# EAGLE board BRD (EAGLE 8.2.2)
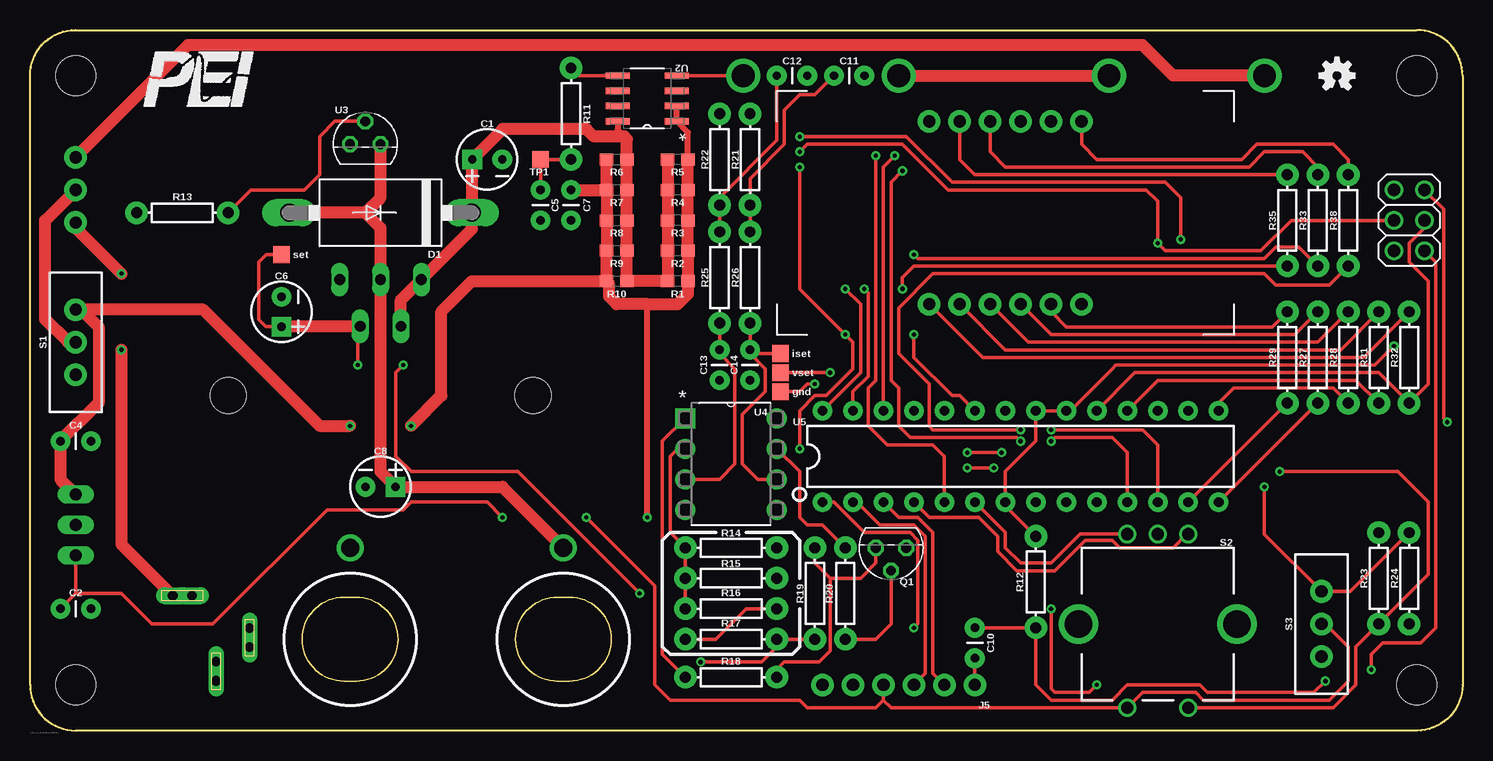
[diagram p0: board, top side]
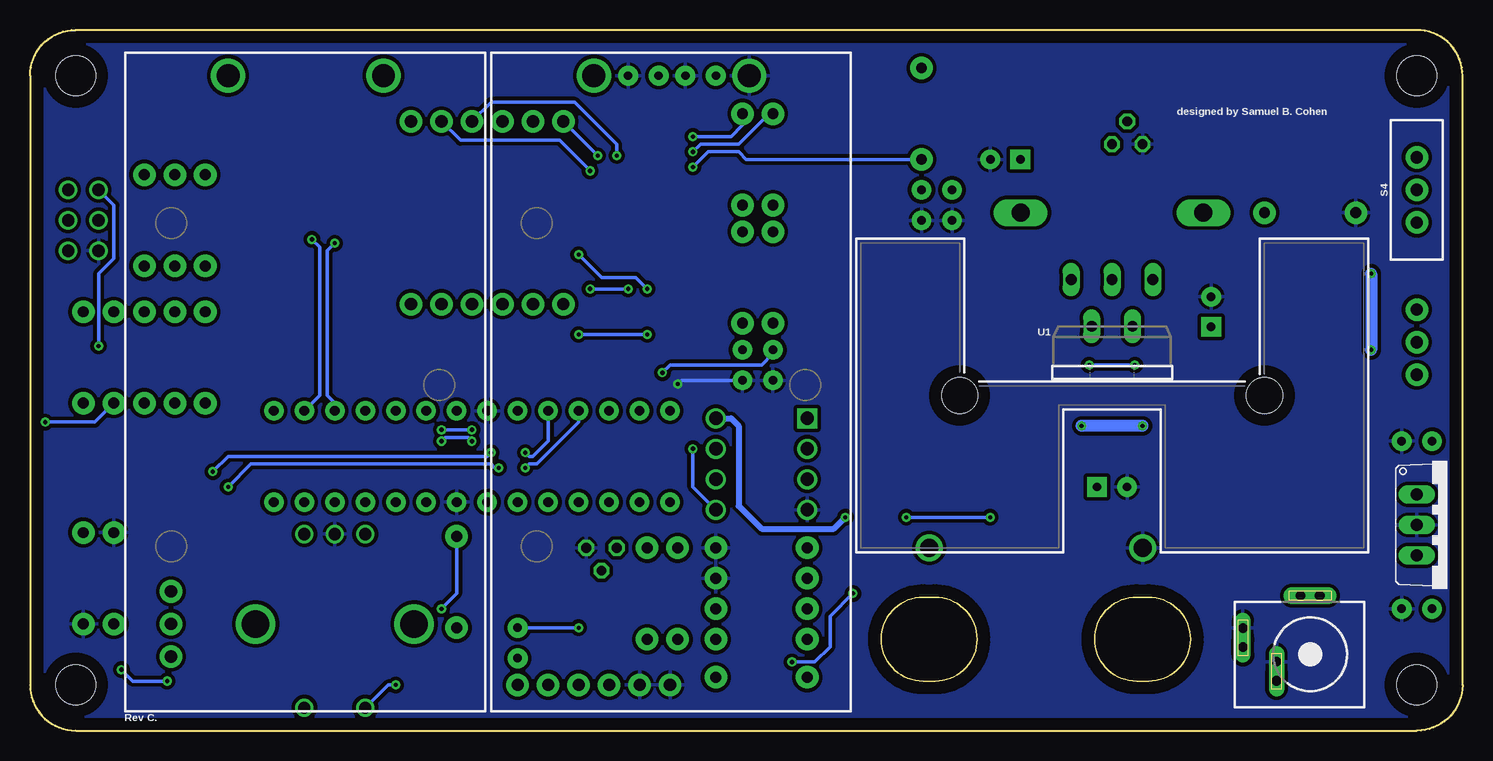
[diagram p1: board, bottom side, seen from below]

Size 119.38 x 58.42 mm. Coordinates in mm from the lower left corner, seen from the top.
Outline: 0,3.81 0,54.61 arc-90 3.81,58.42 115.57,58.42 arc-90 119.38,54.61 119.38,3.81 arc-90 115.57,0 3.81,0 arc-90 0,3.81
Copper layers (1*16): Top 0.035mm / dielectric 1.5mm / Bottom 0.035mm
Design rules "default": minimum track width 6mil, minimum drill 0.35mm, track to track 6mil, track to pad 6mil, pad to pad 6mil, via to via 6mil, smd to smd 6mil, copper to edge 40mil, drill to drill 6mil, minimum pad ring 10mil, minimum via ring 8mil, stop-mask expansion 4mil, vias tented up to drill 0mil, thermal gap 10mil

## Footprints (pad centres in the part's own frame; a part is rotated, then mirrored left to right if it is on the bottom)
BATTCON_9V = drill 1.905: + 0,0; - 0,-12.954
CPOL-RADIAL-2.5MM-5MM = drill 0.7 pad 1.651 square: 1 1.25,0 | drill 0.7 pad 1.651: 2 -1.25,0
CAP-PTH-2.54 = drill 0.7 pad 1.651: 1 -1.27,0; 2 1.27,0
DO201-15 = drill 1.499 long: A 7.62,0; C -7.62,0
STAND-OFF = hole 3.302: 0,0
6400BG_HEATSINK = hole 2.997: -12.7,0; 12.7,0
TO220V = drill 1.016 long: 1 -2.54,-2.54; 2 0,-2.54; 3 2.54,-2.54
PINHD2X03 = drill 1.016: 1 -2.54,1.27; 2 -2.54,-1.27; 3 0,1.27; 4 0,-1.27; 5 2.54,1.27; 6 2.54,-1.27
BINDING_POST = drill 1.5: P$1 0,7.62
1X06_NO_SILK = drill 1.016 pad 1.88: 1 0,0; 2 2.54,0; 3 5.08,0; 4 7.62,0; 5 10.16,0; 6 12.7,0
TO92 = drill 0.813 octagon: 1 1.27,0; 2 0,1.905; 3 -1.27,0
0603 = smd 1.1 x 1: 1 -0.85,0; 2 0.85,0
AXIAL-0.3 = drill 0.9 pad 1.88: P$1 -3.81,0; P$2 3.81,0
SWITCH_SPDT_PTH_11.6X4.0MM_LOCK = drill 1.016 pad 1.88: 1 0,2.718; 2 0,0; 3 0,-2.718
ROTARY_ENC_PLAIN = drill 1.016: A 7.493,-2.54; B 7.493,2.54; C 7.493,0; SW+ -6.985,2.54; SW- -6.985,-2.54 | drill 2.286: P$3 0,6.604; P$4 0,-6.604
TP14SQ = smd 1.4 x 1.4: TP 0,0
TO220-51 = drill 0.9 long: 1 -3.4,-8.4; 2 -1.7,-4.5; 3 0,-8.4; 4 1.7,-4.5; 5 3.4,-8.4
SOIC127P600X175-8N = smd 1.981 x 0.533: 1 -2.464,1.905; 2 -2.464,0.635; 3 -2.464,-0.635; 4 -2.464,-1.905; 5 2.464,-1.905; 6 2.464,-0.635; 7 2.464,0.635; 8 2.464,1.905
DIP254P762X508-8 = drill 1.118 square: 1 -7.62,7.62 | drill 1.118: 2 -7.62,5.08; 3 -7.62,2.54; 4 -7.62,0; 5 0,0; 6 0,2.54; 7 0,5.08; 8 0,7.62
DIP28 = drill 0.813 pad 1.626: 1 -16.51,-3.81; 2 -13.97,-3.81; 3 -11.43,-3.81; 4 -8.89,-3.81; 5 -6.35,-3.81; 6 -3.81,-3.81; 7 -1.27,-3.81; 8 1.27,-3.81; 9 3.81,-3.81; 10 6.35,-3.81; 11 8.89,-3.81; 12 11.43,-3.81; 13 13.97,-3.81; 14 16.51,-3.81; 15 16.51,3.81; 16 13.97,3.81; 17 11.43,3.81; 18 8.89,3.81; 19 6.35,3.81; 20 3.81,3.81; 21 1.27,3.81; 22 -1.27,3.81; 23 -3.81,3.81; 24 -6.35,3.81; 25 -8.89,3.81; 26 -11.43,3.81; 27 -13.97,3.81; 28 -16.51,3.81
KLDVX-0202-A = drill 0.8 pad 1.4 long: 1 -4.9,0.8; 1@1 -4.9,-0.8 | drill 0.8 pad 1.3 long: 2 -2.2,-5.6; 2@1 -0.6,-5.6; 3 0.6,-2.8; 3@1 2.2,-2.8

## Placement (x,y rotation side)
BT1  [BATTCON_9V]  102.87,54.61 90 bottom
BT2  [BATTCON_9V]  72.39,54.61 90 bottom
C1  10uF  [CPOL-RADIAL-2.5MM-5MM]  38.1,47.62 180 top
C2  0.1uF  [CAP-PTH-2.54]  3.81,10.16 0 top
C4  0.1uF  [CAP-PTH-2.54]  3.81,24.13 0 top
C5  1uF  [CAP-PTH-2.54]  42.55,43.81 90 top
C6  10uF  [CPOL-RADIAL-2.5MM-5MM]  20.95,34.92 270 top
C7  0.1uF  [CAP-PTH-2.54]  45.09,43.81 270 top
C8  10uF  [CPOL-RADIAL-2.5MM-5MM]  29.21,20.32 0 top
C10  0.1uF  [CAP-PTH-2.54]  78.74,7.3 270 top
C11  0.1uF  [CAP-PTH-2.54]  68.26,54.61 180 top
C12  0.1uF  [CAP-PTH-2.54]  63.5,54.61 180 top
C13  0.1uF  [CAP-PTH-2.54]  57.47,30.48 90 top
C14  0.1uF  [CAP-PTH-2.54]  60.01,30.48 90 top
D1  1N5400  [DO201-15]  29.21,43.18 180 top
H1  STAND-OFF  [STAND-OFF]  115.57,54.61 0 top
H2  STAND-OFF  [STAND-OFF]  3.81,3.81 0 top
H3  STAND-OFF  [STAND-OFF]  115.57,3.81 0 top
H4  STAND-OFF  [STAND-OFF]  3.81,54.61 0 top
H5  6400BG_HEATSINK  [6400BG_HEATSINK]  29.21,27.94 180 bottom
IC1  7805TV  [TO220V]  1.27,17.14 270 bottom
J1  [PINHD2X03]  114.94,42.55 270 top
J2  BINDING_POST  [BINDING_POST]  44.45,7.62 0 top
J3  BINDING_POST  [BINDING_POST]  26.67,7.62 0 top
J4  [1X06_NO_SILK]  74.93,35.56 0 top
J5  [1X06_NO_SILK]  78.74,3.81 180 top
J6  [1X06_NO_SILK]  87.63,50.8 180 top
Q1  2N3904BU  [TO92]  71.75,15.24 180 top
R1  2R  [0603]  53.98,37.47 180 top
R2  2R  [0603]  53.98,40.01 180 top
R3  2R  [0603]  53.98,42.55 180 top
R4  2R  [0603]  53.98,45.09 180 top
R5  2R  [0603]  53.98,47.62 180 top
R6  2R  [0603]  48.9,47.62 0 top
R7  2R  [0603]  48.9,45.09 0 top
R8  2R  [0603]  48.9,42.55 0 top
R9  2R  [0603]  48.9,40.01 0 top
R10  2R  [0603]  48.9,37.47 0 top
R11  330R  [AXIAL-0.3]  45.09,51.44 270 top
R12  10K  [AXIAL-0.3]  83.82,12.38 90 top
R13  100R  [AXIAL-0.3]  12.7,43.18 0 top
R14  10K  [AXIAL-0.3]  58.42,15.24 180 top
R15  10K  [AXIAL-0.3]  58.42,12.7 180 top
R16  10K  [AXIAL-0.3]  58.42,10.16 0 top
R17  10K  [AXIAL-0.3]  58.42,7.62 0 top
R18  1K  [AXIAL-0.3]  58.42,4.45 0 top
R19  100R  [AXIAL-0.3]  65.41,11.43 270 top
R20  10K  [AXIAL-0.3]  67.94,11.43 90 top
R21  10K  [AXIAL-0.3]  60.01,47.62 270 top
R22  10K  [AXIAL-0.3]  57.47,47.62 270 top
R23  10K  [AXIAL-0.3]  112.39,12.7 270 top
R24  10K  [AXIAL-0.3]  114.94,12.7 90 top
R25  10K  [AXIAL-0.3]  57.47,37.78 270 top
R26  10K  [AXIAL-0.3]  60.01,37.78 270 top
R27  10K  [AXIAL-0.3]  107.31,31.11 270 top
R28  10K  [AXIAL-0.3]  109.86,31.11 270 top
R29  10K  [AXIAL-0.3]  104.78,31.11 270 top
R31  10K  [AXIAL-0.3]  112.39,31.11 270 top
R32  10K  [AXIAL-0.3]  114.94,31.11 270 top
R33  10K  [AXIAL-0.3]  107.31,42.55 270 top
R35  10K  [AXIAL-0.3]  104.78,42.55 270 top
R38  10K  [AXIAL-0.3]  109.86,42.55 270 top
S1  [SWITCH_SPDT_PTH_11.6X4.0MM_LOCK]  3.81,32.38 0 top
S2  ENCODER-SWITCH  [ROTARY_ENC_PLAIN]  93.98,8.89 90 top
S3  [SWITCH_SPDT_PTH_11.6X4.0MM_LOCK]  107.63,8.89 0 top
S4  [SWITCH_SPDT_PTH_11.6X4.0MM_LOCK]  3.81,45.09 0 bottom
TP1  TPTP14SQ  [TP14SQ]  42.55,47.62 180 top
TP2  TPTP14SQ  [TP14SQ]  62.55,31.43 0 top
TP3  TPTP14SQ  [TP14SQ]  62.55,29.84 0 top
TP4  TPTP14SQ  [TP14SQ]  20.95,39.69 0 top
TP5  TPTP14SQ  [TP14SQ]  62.55,28.26 0 top
U1  LT3080ETPBF  [TO220-51]  29.21,29.21 180 bottom
U2  MAX4080FASA+  [SOIC127P600X175-8N]  51.44,52.7 180 top
U3  LM334Z-NOPB  [TO92]  27.94,48.9 0 top
U4  TLC2272CP  [DIP254P762X508-8]  62.23,18.41 0 top
U5  328P  [DIP28]  82.55,22.86 0 top
U$1  KLDVX-0202-A  [KLDVX-0202-A]  12.7,6.35 270 bottom
U$2  [OSHW-LOGO-S]  108.92,54.61 0 top

## Library data of the parts
BT1 BT2 = SparkFun-Batteries; PROD_ID: BATT-10855
C1 C6 C8 = SparkFun-Capacitors; PROD_ID: CAP-08440
C2 C4 C5 C7 C10-C14 = SparkFun-Capacitors; PROD_ID: CAP-09128
D1 = Bifrost_parts; DESCRIPTION: Diode, 50V, 3A, Rectifier; MPN: 1N5400G; OC_FARNELL: 1458988; OC_NEWARK: 42K2929; PACKAGE: DO-201AD; SUPPLIER: ON Semiconductors
H1-H4 = SparkFun-Hardware
H5 = SparkFun-Hardware; PROD_ID: COMP-09537; SF_SKU: PRT-09576
IC1 = linear
J1 = Bifrost_parts
J2 J3 = SparkFun-Connectors; PROD_ID: CONN-09675; SF_ID: PRT-09740
J4-J6 = SparkFun-Connectors; PROD_ID: CONN-08437
Q1 = Bifrost_parts; DESCRIPTION: Transistor, NPN; MPN: 2N3904BU; OC_FARNELL: 1700648; OC_NEWARK: 83C3116; PACKAGE: TO-92; SUPPLIER: Fairchild Semiconductors
R1-R10 = SparkFun-Resistors; PROD_ID: RES-08609
R11-R29 R31-R33 R35 R38 = SparkFun-Resistors; PROD_ID: RES-12182
S1 S3 S4 = SparkFun-Switches; PROD_ID: SWCH-08261; SF_SKU: COM-00102
S2 = SparkFun-Switches; SF_SKU: COM-09117
TP1-TP5 = testpad
U1 = Bifrost_parts; DESCRIPTION: Adjustable1.1A Single Resistor Low Dropout Regulator; MPN: LT3080ET#PBF; OC_FARNELL: 1537445; OC_NEWARK: 64M0567; PACKAGE: TO220-51; SUPPLIER: Linear Technologies
U2 = Bifrost_parts; DESCRIPTION: 76V, High-Side, Current-Sense Amplifiers with Voltage Output; MPN: MAX4080FASA+; OC_FARNELL: -; OC_NEWARK: 43K3468; PACKAGE: SOIC-8; SUPPLIER: Maxim
U3 = Bifrost_parts; DESCRIPTION: 3-Terminal Adjustable Current Source; MPN: LM334Z-NOPB; OC_FARNELL: 1564650; OC_NEWARK: 41K4701; PACKAGE: TO-92; SUPPLIER: Texas Instruments
U4 = Texas Instruments_By_element14_Batch_1; MPN: TLC2272CP; OC_FARNELL: 8454051; OC_NEWARK: 35K1183; PACKAGE: PDIP; SUPPLIER: Texas Instruments
U5 = SparkFun-IC-Microcontroller; PROD_ID: IC-09136
U$1 = con-kycon; OC_FARNELL: unknown; OC_NEWARK: unknown
U$2 = SparkFun-Aesthetics

## Nets
5V: C2.1 IC1.3 J1.2 J5.4 R12.P$2 S2.SW+ S3.2 U5.7 U5.20 U5.21
A: R35.P$2 U5.27
B: R38.P$2 U5.12
BTN: R23.P$2 S2.SW- U5.24
C: R27.P$2 U5.14
D: J1.1 R31.P$2 U5.18
D1: J6.6 U5.26
D2: J6.3 U5.5
D3: J6.2 U5.11
DP: R28.P$2 U5.15
E: J1.3 R32.P$2 U5.19
F: R33.P$2 U5.28
G: R29.P$2 U5.13
GND: BT2.- C1.2 C2.2 C4.2 C5.1 C6.2 C7.2 C8.2 C11.1 C12.1 C13.1 C14.1 IC1.2 J1.6 J3.P$1 J5.5 J5.6 Q1.3 R13.P$1 R14.P$1 R15.P$1 R23.P$1 R24.P$1 S2.C TP5.TP U2.4 U3.3 U4.4 U5.8 U5.22 U$1.2 U$1.3
ISENSE: C5.2 R11.P$2 TP1.TP U4.5 U5.23
ISET: C14.2 R26.P$2 TP2.TP U4.6
ISETMCU: R21.P$1 U5.16
LIMIT: R20.P$2 U4.7
LOAD: R24.P$2 S3.1 U5.25
N$1: S4.3 U$1.1
N$2: C10.2 J5.1
N$4: C1.1 D1.C R1.2 R2.2 R3.2 R4.2 R5.2 R6.2 R7.2 R8.2 R9.2 R10.2 U1.4 U1.5 U2.8
N$5: R11.P$1 U2.5
N$6: R18.P$1 U4.1
N$7: R13.P$2 U3.2
N$8: Q1.1 R18.P$2 R19.P$1
N$9: Q1.2 R20.P$1
N$10: R16.P$2 R17.P$1
N$11: R14.P$2 R15.P$2 R16.P$1 U4.2
N$13: BT1.- BT2.+
N$14: S1.2 S4.2
N$15: BT1.+ S4.1
N$17: J4.5 R29.P$1
N$18: J4.4 R27.P$1
N$19: J4.3 R28.P$1
N$20: C11.2 R21.P$2 R26.P$1
N$21: C12.2 R22.P$2 R25.P$1
N$22: J4.2 R31.P$1
N$23: J4.1 R32.P$1
N$31: J6.5 R35.P$1
N$32: J6.4 R33.P$1
N$35: J6.1 R38.P$1
OUT: C8.1 D1.A J2.P$1 U1.3 U3.1
QUADA: S2.A U5.4
QUADB: S2.B U5.6
RESET: C10.1 J1.5 R12.P$1 U5.1
RX: J5.3 U5.2
SET: C6.1 R17.P$2 R19.P$2 TP4.TP U1.2
TX: J5.2 U5.3
VCC: C4.1 C7.1 IC1.1 R1.1 R2.1 R3.1 R4.1 R5.1 R6.1 R7.1 R8.1 R9.1 R10.1 S1.1 U2.1 U2.2 U4.8
VSET: C13.2 R25.P$2 TP3.TP U4.3
VSETMCU: J1.4 R22.P$1 U5.17

## Tracks (layer width: path | path; a pad name or v marks a point on that pad's centre or on a via)
5V  (via drill 0.35)
  Top 0.305: IC1.3 3.81,11.43 | 3.81,11.43 C2.1 | 3.81,11.43 7.62,11.43 10.16,8.89 15.24,8.89 24.77,18.41 31.11,18.41 31.75,19.05 38.1,19.05 v39.37,17.78 | S3.2 107.95,8.57 108.27,8.57 109.86,6.99 109.86,4.13 108.27,2.54 97.79,2.54 97.16,3.17 92.71,3.17 S2.SW+ 71.75,1.91 71.12,2.54 | v46.35,17.78 52.07,12.06 52.07,3.81 53.34,2.54 64.14,2.54 64.77,1.91 70.48,1.91 71.12,2.54 | 71.12,2.54 J5.4 | R12.P$2 81.28,18.73 U5.7 81.28,21.59 83.82,24.13 U5.21 U5.20 86.68,26.67 90.17,30.16 90.49,30.48 112.08,30.48 v113.67,32.07 | v85.09,10.16 85.09,3.49 85.41,3.17 88.27,3.17 v88.9,3.81
  Bottom 0.305: v39.37,17.78 v46.35,17.78 | R12.P$2 83.82,11.43 v85.09,10.16 | v88.9,3.81 89.53,3.81 S2.SW+ | v113.67,32.07 113.67,38.1 112.39,39.37 112.39,43.81 J1.2
A  (via drill 0.35)
  Top 0.305: U5.27 68.58,28.26 69.85,29.53 69.85,36.51 v69.53,36.83 | v72.71,36.83 72.71,37.78 73.66,38.73 R35.P$2
  Bottom 0.305: v69.53,36.83 v72.71,36.83
B  (via drill 0.35)
  Top 0.305: U5.12 93.98,23.81 92.71,25.08 v85.09,25.08 | v82.55,25.08 75.25,25.08 74.93,25.4 74.93,28.89 72.39,31.43 72.39,35.24 75.25,38.1 102.87,38.1 103.82,37.15 108.27,37.15 R38.P$2
  Bottom 0.305: v85.09,25.08 v82.55,25.08
BTN  (via drill 0.35)
  Top 0.305: S2.SW- 108.58,1.91 110.49,3.81 110.49,6.99 R23.P$2 116.52,13.02 116.52,19.05 113.98,21.59 v104.14,21.59 | v78.11,23.18 v80.96,23.18
  Bottom 0.305: U5.24 76.2,24.13 77.47,22.86 77.79,22.86 v78.11,23.18 | v104.14,21.59 102.87,22.86 81.28,22.86 v80.96,23.18
C
  Top 0.305: U5.14 R27.P$2
D  (via drill 0.35)
  Top 0.305: J1.1 117.79,43.5 117.79,26.04 v118.11,25.72 | R31.P$2 110.49,29.21 93.98,29.21 U5.18
  Bottom 0.305: v118.11,25.72 113.98,25.72 R31.P$2
D1  (via drill 0.35)
  Top 0.305: U5.26 71.12,46.99 v72.07,47.94
  Bottom 0.305: v72.07,47.94 J6.6
D2  (via drill 0.35)
  Top 0.305: U5.5 76.2,22.86 75.25,23.81 71.44,23.81 69.85,25.4 69.85,28.57 70.48,29.21 v70.48,47.94
  Bottom 0.305: v70.48,47.94 70.48,48.9 73.98,52.39 80.96,52.39 J6.3
D3  (via drill 0.35)
  Top 0.305: U5.11 91.44,23.18 90.17,24.45 85.41,24.45 v85.09,24.13 | v82.55,24.13 82.23,24.45 73.34,24.45 72.39,25.4 72.39,28.57 71.75,29.21 71.75,45.72 v72.71,46.67
  Bottom 0.305: v85.09,24.13 84.77,24.45 82.87,24.45 v82.55,24.13 | v72.71,46.67 75.25,49.21 83.5,49.21 J6.2
DP
  Top 0.305: U5.15 99.06,27.3 100.33,28.57 108.58,28.57 R28.P$2
E
  Top 0.305: J1.3 116.2,41.91 114.94,40.64 114.94,39.05 116.52,37.47 116.52,28.89 R32.P$2 112.39,29.84 92.08,29.84 U5.19
F  (via drill 0.35)
  Top 0.305: U5.28 69.22,29.84 69.22,35.56 v67.94,36.83 | v73.66,39.69 73.98,39.37 102.87,39.37 103.82,40.32 105.73,40.32 R33.P$2
  Bottom 0.305: v73.66,39.69 71.75,37.78 68.9,37.78 v67.94,36.83
G
  Top 0.305: U5.13 R29.P$2
GND  (via drill 0.35)
  Top 0.305: v65.41,28.89 64.77,28.89 64.14,28.26 TP5.TP | U2.4 BT2.-
  Bottom 0.305: C14.1 65.09,29.21 v65.41,28.89
  pour Bottom (isolate 0.305): 3.81,58.42 arc90 0,54.61 0,3.81 arc90 3.81,0 5.08,0 115.57,0 arc90 119.38,3.81 119.38,54.61 arc90 115.57,58.42 114.3,58.42
ISENSE  (via drill 0.35)
  Top 0.305: TP1.TP C5.2 | TP1.TP | R11.P$2 TP1.TP | v73.66,33.02 73.66,31.11 76.83,27.94 77.47,27.94 U5.23 | v64.14,23.5 64.14,26.67 65.41,27.94 66.36,27.94 68.58,30.16 68.58,32.38 v67.94,33.02 64.14,36.83 v64.14,46.99
  Bottom 0.305: U4.5 64.14,20.32 v64.14,23.5 | v67.94,33.02 v73.66,33.02 | R11.P$2 59.69,47.62 60.33,48.26 62.87,48.26 v64.14,46.99
ISET
  Top 0.305: C14.2 R26.P$2 | C14.2 60.01,31.43 61.28,30.16 61.28,28.26 59.37,26.35 59.37,22.23 60.64,20.95 U4.6 | TP2.TP 60.33,31.43 C14.2
ISETMCU  (via drill 0.35)
  Top 0.305: v64.14,49.53 73.03,49.53 76.83,45.72 94.61,45.72 95.89,44.45 v95.89,40.96
  Bottom 0.305: R21.P$1 60.01,50.48 60.96,49.53 v64.14,49.53 | U5.16 95.25,27.94 95.25,40.32 v95.89,40.96
LIMIT
  Top 0.305: R20.P$2 66.04,17.14 64.77,17.14 64.14,17.78 64.14,21.59 U4.7
LOAD  (via drill 0.35)
  Top 0.305: R24.P$2 110.03,11.61 S3.1 102.87,16.37 v102.87,20.32 | v78.11,21.91 v80.33,21.91
  Bottom 0.305: U5.25 73.66,25.72 77.15,22.23 77.79,22.23 v78.11,21.91 | v102.87,20.32 100.97,22.23 80.96,22.23 80.64,21.91 v80.33,21.91
N$1  (via drill 0.35)
  Top 1.016: S4.3 3.81,41.91 v7.62,38.1 | v7.62,31.75 7.62,15.53 U$1.1
  Bottom 1.016: v7.62,38.1 v7.62,31.75
N$2
  Top 0.305: C10.2 J5.1
N$4
  Top 0.508: U2.8 48.97,50.09 49.53,49.53
  Top 1.016: R5.2 R4.2 R3.2 R2.2 R1.2 R10.2 R9.2 R8.2 R7.2 R6.2 49.74,49.31 49.53,49.53 46.99,49.53 46.35,50.16 39.39,50.16 C1.1 36.83,47.6 D1.C 36.83,41.83 U1.5 30.91,35.91 U1.4
N$5
  Top 0.305: U2.5 45.72,54.61 R11.P$1
N$6
  Top 0.305: R18.P$1 52.7,6.35 52.7,24.13 U4.1
N$7
  Top 0.305: U3.2 25.4,50.8 24.13,49.53 24.13,46.35 22.86,45.09 18.41,45.09 R13.P$2
N$8
  Top 0.305: Q1.1 70.48,13.97 69.22,12.7 66.67,12.7 | 66.67,12.7 65.41,13.97 R19.P$1 | 66.67,12.7 66.67,6.63 65.75,5.71 62.87,5.71 62.23,5.08 R18.P$2
N$9
  Top 0.305: R20.P$1 70.48,7.62 71.75,8.89 Q1.2
N$10
  Top 0.305: R17.P$1 57.15,7.62 59.69,10.16 R16.P$2
N$11
  Top 0.305: R16.P$1 R15.P$2 R14.P$2 53.34,16.51 53.34,22.86 53.98,23.5 U4.2
N$13
  Top 1.016: BT2.+ BT1.-
N$14
  Top 1.016: S1.2 3.17,32.38 1.27,34.29 1.27,42.55 S4.2
N$15
  Top 1.016: BT1.+ 95.25,54.61 92.71,57.15 13.16,57.15 S4.1
N$17
  Top 0.305: J4.5 85.09,34.92 86.36,33.66 103.5,33.66 R29.P$1
N$18
  Top 0.305: J4.4 85.09,33.02 105.41,33.02 R27.P$1
N$19
  Top 0.305: J4.3 83.19,32.38 107.31,32.38 R28.P$1
N$20
  Top 0.305: C11.2 65.41,53.02 64.14,53.02 62.87,51.75 62.87,48.9 60.01,46.04 R21.P$2 R26.P$1
N$21
  Top 0.305: C12.2 62.23,49.21 57.47,44.45 R22.P$2 R25.P$1
N$22
  Top 0.305: J4.2 81.28,31.75 109.22,31.75 R31.P$1
N$23
  Top 0.305: J4.1 79.38,31.11 111.12,31.11 R32.P$1
N$31
  Top 0.305: J6.5 77.47,47.62 78.74,46.35 R35.P$1
N$32
  Top 0.305: J6.4 80.01,48.26 81.28,46.99 101.6,46.99 102.87,48.26 106.05,48.26 107.31,46.99 R33.P$1
N$35
  Top 0.305: J6.1 87.63,48.9 88.9,47.62 100.97,47.62 102.23,48.9 108.58,48.9 109.86,47.62 R38.P$1
OUT
  Top 1.016: 27.94,43.18 D1.A | 27.94,43.18 29.21,44.45 U3.1 | 27.94,43.18 29.21,41.91 U1.3 29.21,21.57 C8.1 39.37,20.32 J2.P$1
QUADA
  Top 0.305: S2.A 96.39,16.38 95.25,15.24 90.81,15.24 90.17,15.88 87.95,15.88 85.41,13.34 82.23,13.34 80.64,14.92 80.64,16.19 79.06,17.78 74.93,17.78 U5.4
QUADB
  Top 0.305: S2.B 87.5,16.38 85.09,13.97 82.55,13.97 81.28,15.24 81.28,16.51 U5.6
RESET  (via drill 0.35)
  Top 0.305: C10.1 R12.P$1 83.82,3.81 85.09,2.54 90.17,2.54 91.44,3.81 97.47,3.81 98.11,3.17 107,3.17 v107.95,4.13 | U5.1 66.99,19.05 69.53,16.51 73.34,16.51 73.98,15.88 73.98,8.89 v73.66,8.57 | v111.76,5.08 111.76,6.35 112.71,7.3 115.89,7.3 117.16,8.57 117.16,39.05 J1.5
  Bottom 0.305: v73.66,8.57 C10.1 | v107.95,4.13 110.81,4.13 v111.76,5.08
RX
  Top 0.305: U5.2 68.9,19.05 70.8,17.14 73.66,17.14 74.61,16.19 74.61,4.76 J5.3
SET  (via drill 0.35)
  Top 0.305: R19.P$2 R17.P$2 62.23,6.99 60.96,5.71 v55.88,5.71 | v50.8,11.43 40.64,21.59 31.75,21.59 30.48,22.86 30.48,29.84 v31.11,30.48 | v27.3,30.48 27.3,33.51 U1.2 | C6.1 19.66,33.67 19.05,34.29 19.05,39.05 19.68,39.69 TP4.TP
  Top 1.016: U1.2 20.99,33.71 C6.1
  Bottom 0.305: v55.88,5.71 53.98,5.71 52.7,6.99 52.7,9.53 v50.8,11.43 | v31.11,30.48 v27.3,30.48
TX
  Top 0.305: U5.3 72.39,17.78 73.98,17.78 75.25,16.51 75.25,4.76 J5.2
VCC  (via drill 0.35)
  Top 0.508: R5.1 54.83,49.87 U2.1 U2.2 | v51.44,17.78 51.44,35.52 51.48,35.56
  Top 1.016: C7.1 R7.1 | R7.1 R8.1 R9.1 R10.1 | R7.1 R6.1 | R5.1 R4.1 R3.1 R2.1 R1.1 54.83,36.41 53.98,35.56 51.48,35.56 48.9,35.56 48.26,36.2 48.26,37.25 R10.1 | v26.67,25.4 24.13,25.4 14.43,35.1 S1.1 4.27,35.1 5.71,33.66 5.71,27.3 C4.1 2.54,20.95 IC1.1 | v31.75,25.4 34.29,27.94 34.29,34.92 36.83,37.47 R10.1
  Bottom 0.508: U4.8 60.96,26.04 60.33,25.4 60.33,18.73 58.42,16.83 52.39,16.83 v51.44,17.78
  Bottom 1.016: v26.67,25.4 v31.75,25.4
VSET  (via drill 0.35)
  Top 0.305: R25.P$2 C13.2 57.47,31.43 58.74,30.16 58.74,22.23 57.47,20.95 U4.3 | v66.67,29.84 TP3.TP
  Bottom 0.305: C13.2 57.47,31.43 58.42,30.48 66.04,30.48 v66.67,29.84
VSETMCU  (via drill 0.35)
  Top 0.305: v64.14,48.26 64.77,48.9 72.71,48.9 76.52,45.09 93.03,45.09 93.98,44.13 v93.98,40.64 94.61,40.01 102.55,40.01 105.09,42.55 J1.4
  Bottom 0.305: R22.P$1 57.78,51.44 60.33,48.9 63.5,48.9 v64.14,48.26 | U5.17 93.98,27.3 94.61,27.94 94.61,40.01 v93.98,40.64

## Text on the board
tPlace: set | iset | vset | gnd | C:/Users/scohen/Downloads/PEI.bmp
bPlace: designed by Samuel B. Cohen | Rev C.